# Altium PCB motordriver-v5.0.PcbDoc (part 1 of 2)
Units mil, origin at the board's own origin, x right, y up, seen from the top; angles counter-clockwise.
Board outline 6000 x 4000 mil, 4 copper layers (Top Copper, Signal Layer 1, Signal Layer 2, Bottom Copper), stack 46.063 mil thick; 260 components, 214 nets, 1002 pads, 160 vias.
Unrouted connection lines stored in the file: 596.
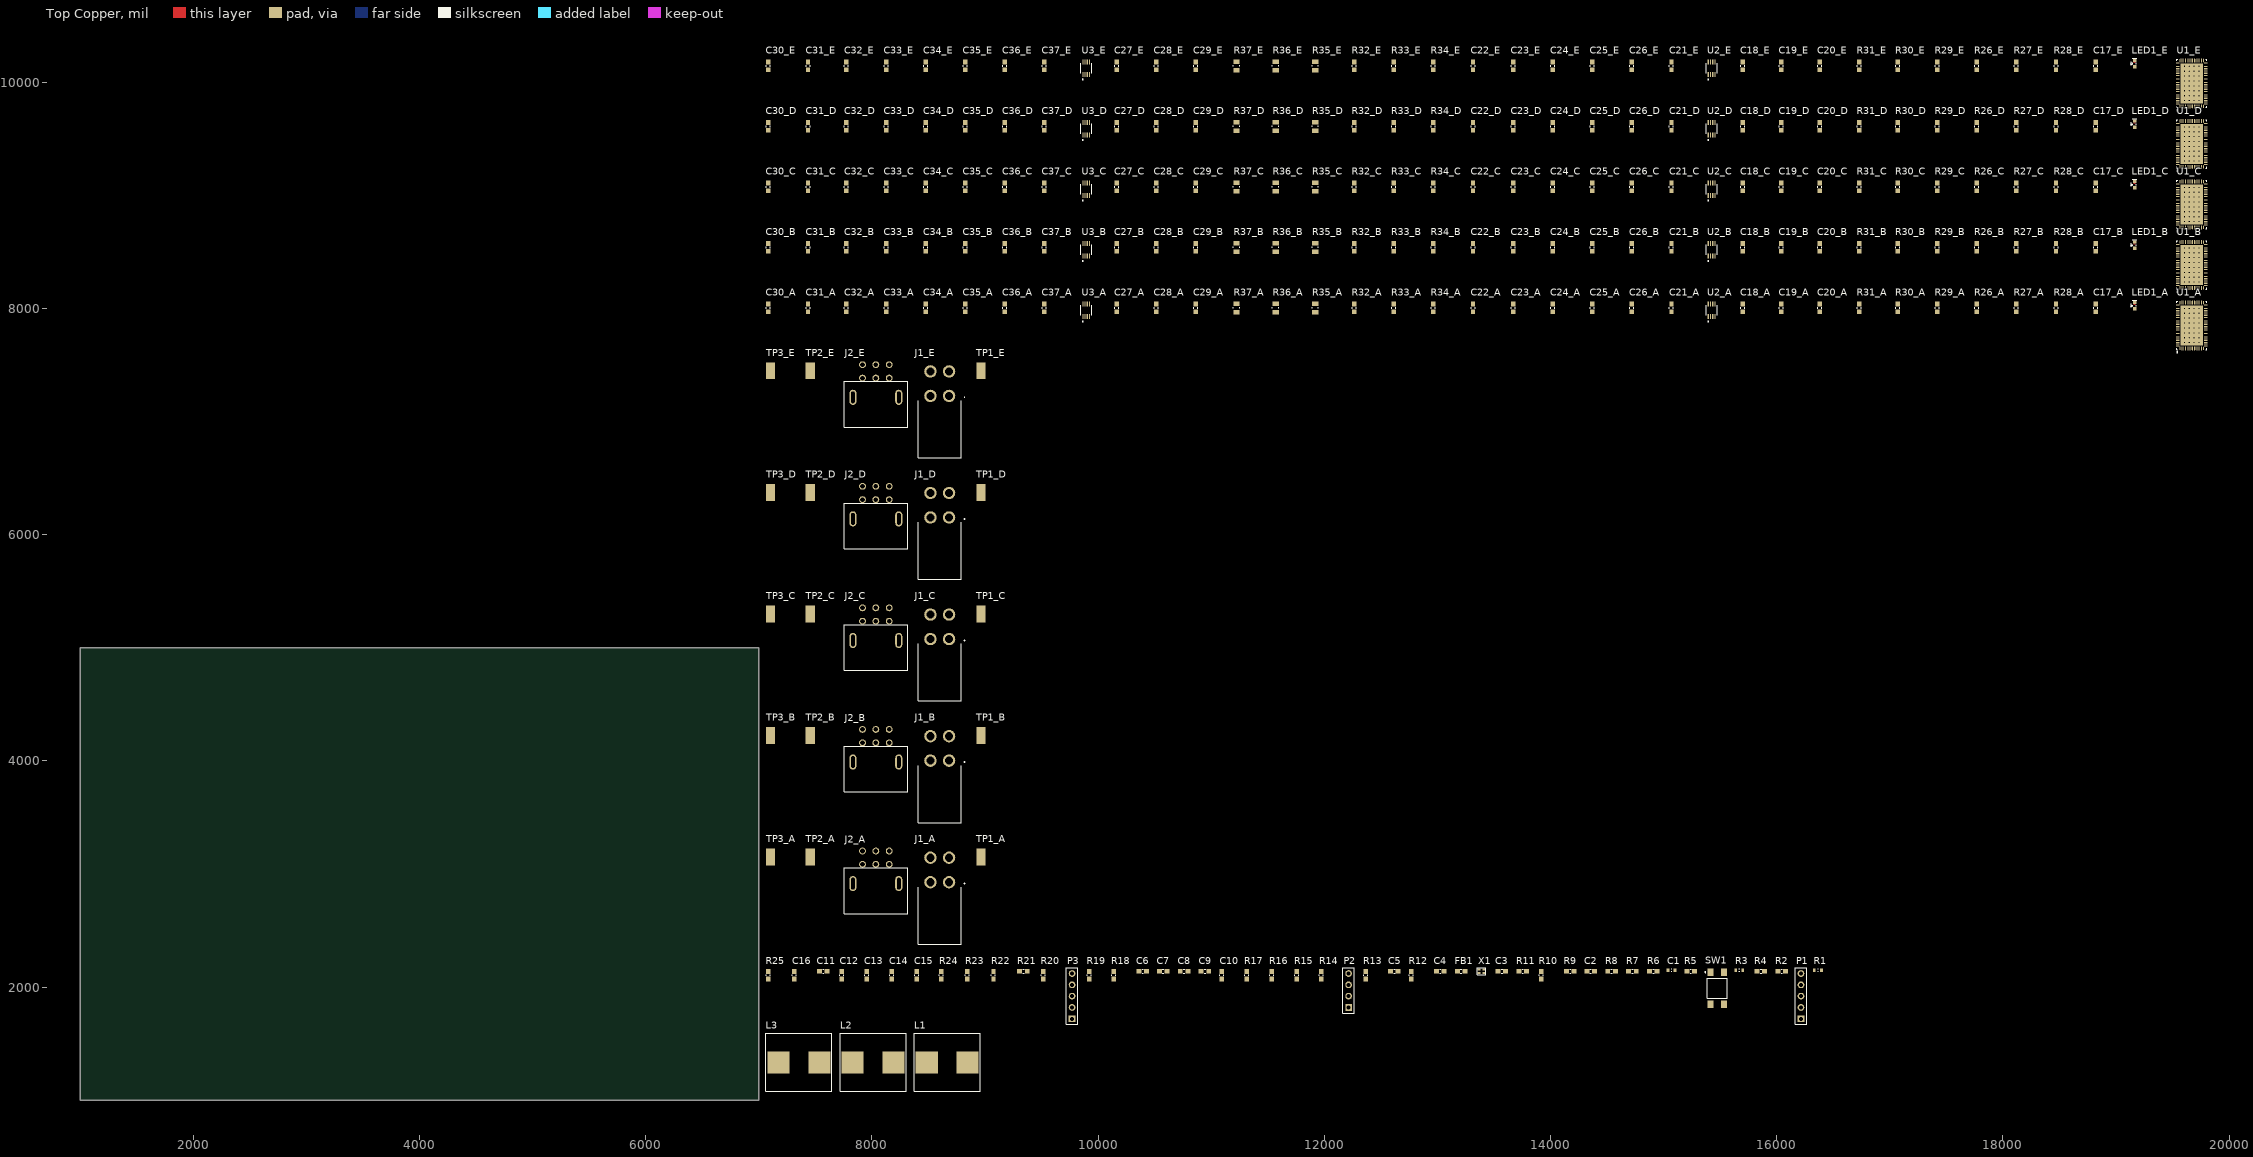
[diagram p0: Top Copper view]
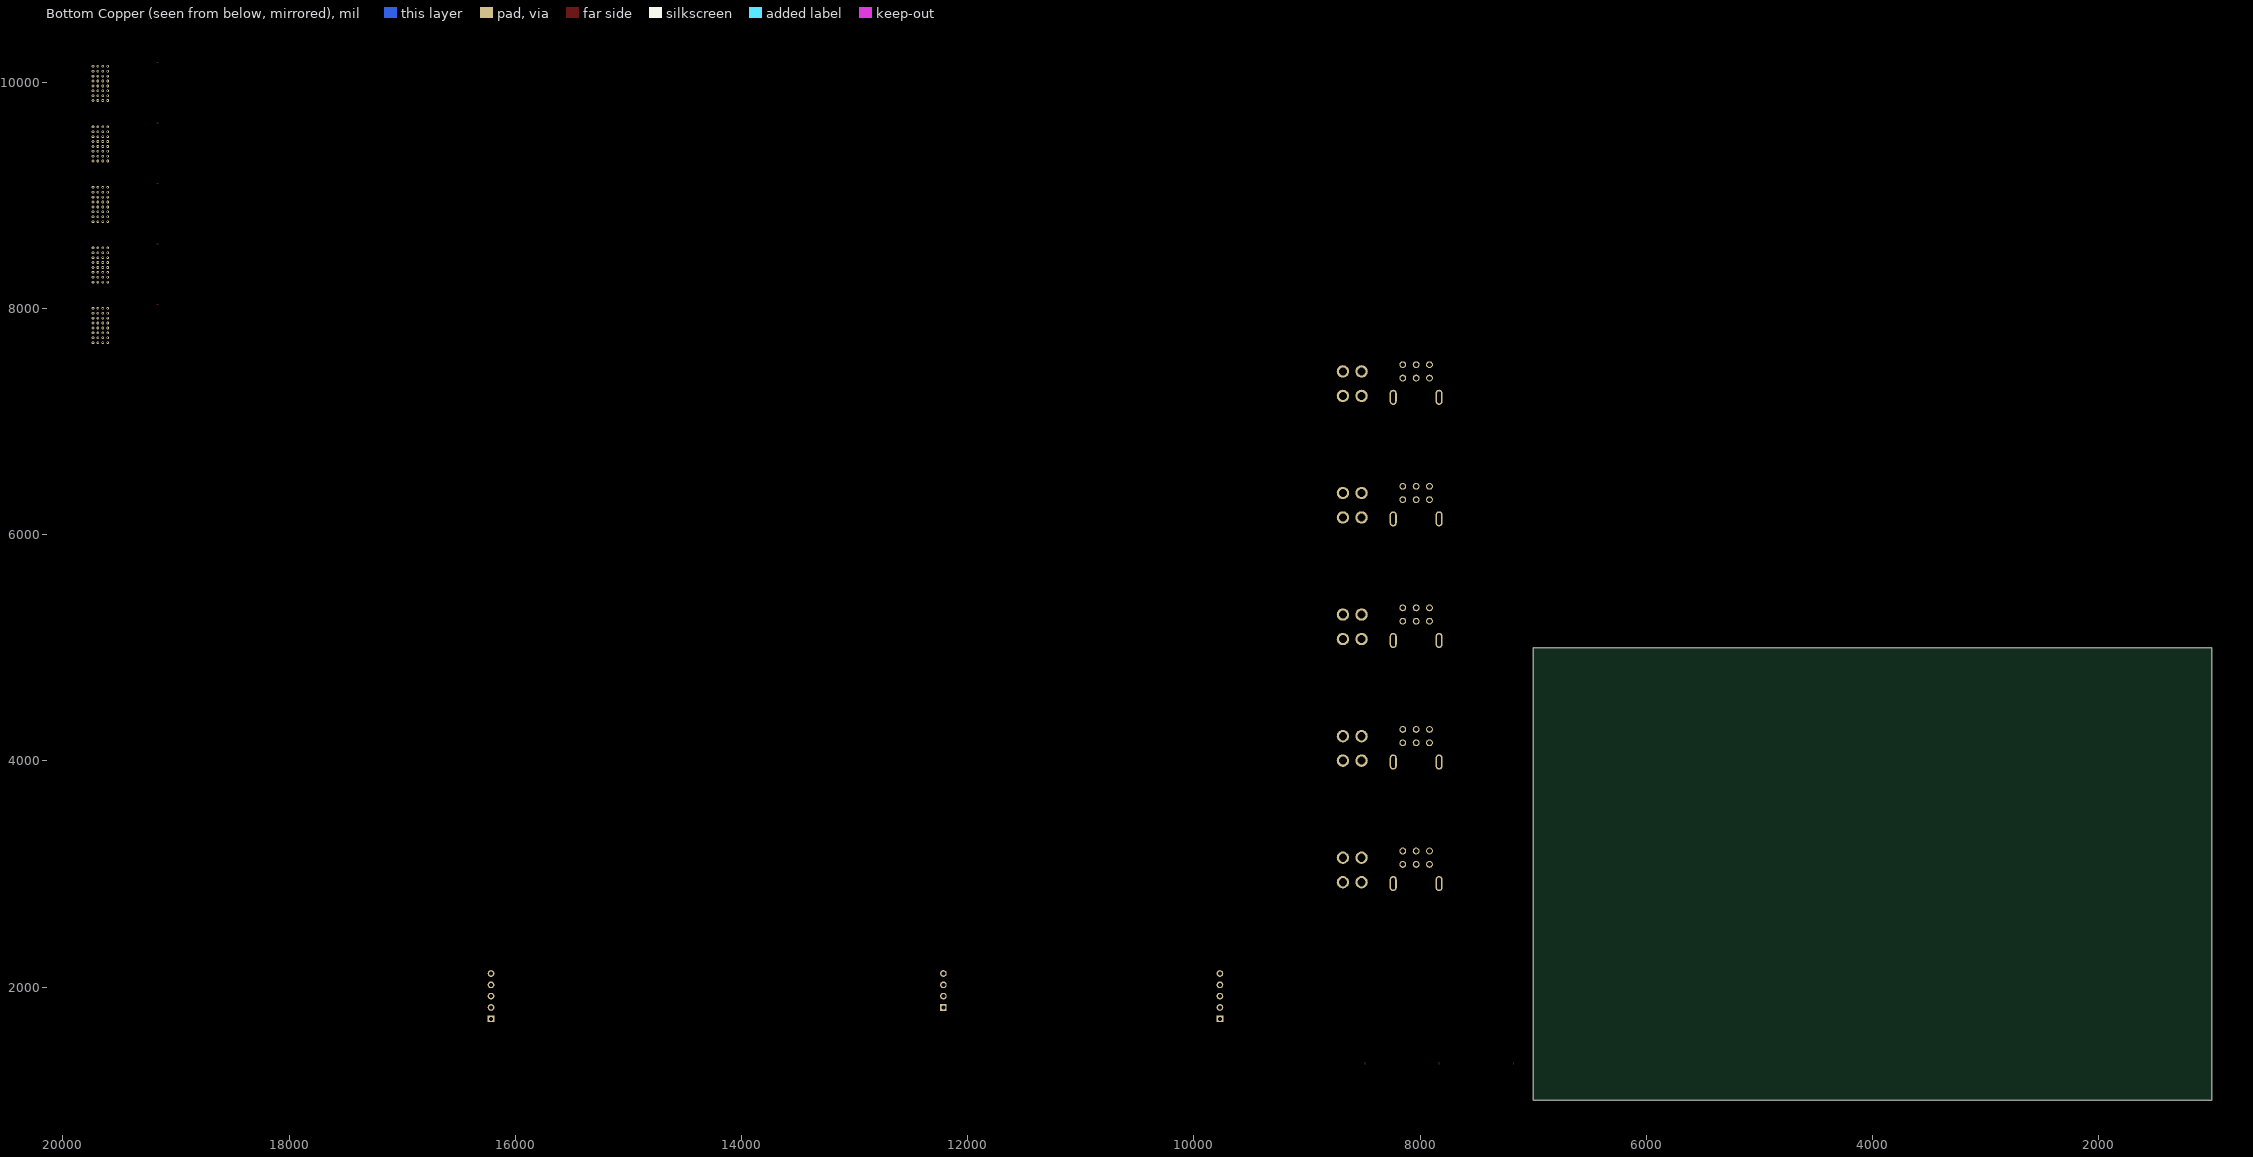
[diagram p1: Bottom Copper view, seen from below]

## Layer stack, top to bottom
Top Mask: solder mask 0.5906, Solder Resist, Dk 3.8
Top Copper: signal copper 1.378
Dielectric 1: prepreg 3.937, 2313, Dk 4.05
Signal Layer 1: signal copper 0.689
Core: core 34.0551, FR-4, Dk 4.5
Signal Layer 2: signal copper 0.689
Dielectric 2: prepreg 3.937, 2313, Dk 4.05
Bottom Copper: signal copper 1.378
Bottom Mask: solder mask 0.5906, Solder Resist, Dk 3.8

## Board outline
1000,1000 7000,1000 7000,5000 1000,5000

## Design rules (kind name [scope] priority, off if disabled: settings)
Clearance [All] p1: gap=10 ignorepadtopadclearanceinfootprint=FALSE except(0: Arc-Hole Track-Hole SMDPad-Hole THPad-Hole Via-Hole Fill-Hole Poly-Hole Region-Hole Text-Hole)
PolygonConnect [All] p1: connectstyle=Relief reliefconductorwidth=10 reliefentries=4 polygonreliefangle="90 Angle" airgapwidth=10
RoomDefinition "Trinamic Controller5" [InComponentClass('Trinamic Controller5')] p1: confinementstyle=ConfineIn formatcopy=TRUE lockcomponents=FALSE outline 7045,9735 19820,9735 19820,10330 7045,10330
RoomDefinition "Trinamic Controller4" [InComponentClass('Trinamic Controller4')] p2: confinementstyle=ConfineIn formatcopy=TRUE lockcomponents=FALSE outline 7045,9200 19820,9200 19820,9795 7045,9795
RoomDefinition "Trinamic Controller3" [InComponentClass('Trinamic Controller3')] p3: confinementstyle=ConfineIn formatcopy=TRUE lockcomponents=FALSE outline 7045,8665 19820,8665 19820,9260 7045,9260
RoomDefinition "Trinamic Controller2" [InComponentClass('Trinamic Controller2')] p4: confinementstyle=ConfineIn formatcopy=TRUE lockcomponents=FALSE outline 7045,8130 19820,8130 19820,8725 7045,8725
RoomDefinition "Trinamic Controller1" [InComponentClass('Trinamic Controller1')] p5: confinementstyle=ConfineIn formatcopy=TRUE lockcomponents=FALSE outline 7045,7595 19820,7595 19820,8190 7045,8190
RoomDefinition "Peripherals (No Duplicates)" [InComponentClass('Peripherals (No Duplicates)')] p6: confinementstyle=ConfineIn formatcopy=TRUE lockcomponents=FALSE outline 7045,1660 16425,1660 16425,2280 7045,2280
RoomDefinition INDUCTORS [InComponentClass('INDUCTORS')] p7: confinementstyle=ConfineIn formatcopy=TRUE lockcomponents=FALSE outline 7045,1060 8975,1060 8975,1710 7045,1710
RoomDefinition Connectors5 [InComponentClass('Connectors5')] p8: confinementstyle=ConfineIn formatcopy=TRUE lockcomponents=FALSE outline 7045,6630 9210,6630 9210,7655 7045,7655
RoomDefinition Connectors4 [InComponentClass('Connectors4')] p9: confinementstyle=ConfineIn formatcopy=TRUE lockcomponents=FALSE outline 7045,5555 9210,5555 9210,6580 7045,6580
RoomDefinition Connectors3 [InComponentClass('Connectors3')] p10: confinementstyle=ConfineIn formatcopy=TRUE lockcomponents=FALSE outline 7045,4480 9210,4480 9210,5505 7045,5505
RoomDefinition Connectors2 [InComponentClass('Connectors2')] p11: confinementstyle=ConfineIn formatcopy=TRUE lockcomponents=FALSE outline 7045,3405 9210,3405 9210,4430 7045,4430
RoomDefinition Connectors1 [InComponentClass('Connectors1')] p12: confinementstyle=ConfineIn formatcopy=TRUE lockcomponents=FALSE outline 7045,2330 9210,2330 9210,3355 7045,3355
RoutingVias [All] p1: holewidth=28 width=50 viastyle="Through Hole" minholewidth=28 minwidth=50 maxholewidth=28 maxwidth=50
SolderMaskExpansion [All] p1: expansion=4 istentingtop=FALSE
Width [All] p1: maxlimit=10 minlimit=10 preferedwidth=10
30 further rules are at their usual default settings.

## Classes and differential pairs
channel class motordriver-v5.0_trinamic-controller: "Trinamic Controller1" "Trinamic Controller2" "Trinamic Controller3" "Trinamic Controller4" "Trinamic Controller5"
channel class motordriver-v5.0_driver-power-stage: "Driver Power Stage1" "Driver Power Stage2" "Driver Power Stage3" "Driver Power Stage4" "Driver Power Stage5"
channel class motordriver-v5.0_current-sense: "Current Sensing1" "Current Sensing2" "Current Sensing3" "Current Sensing4" "Current Sensing5"
channel class motordriver-v5.0_connectors: Connectors1 Connectors2 Connectors3 Connectors4 Connectors5
net class STATUS_CTRL[1..5]: STATUS_CTRL1 STATUS_CTRL2 STATUS_CTRL3 STATUS_CTRL4 STATUS_CTRL5
component class "Trinamic Controller5": C17_E C18_E C19_E C20_E C21_E C22_E C23_E C24_E C25_E C26_E C27_E C28_E C29_E C30_E C31_E C32_E C33_E C34_E C35_E C36_E C37_E LED1_E R26_E R27_E R28_E R29_E R30_E R31_E R32_E R33_E R34_E R35_E R36_E R37_E U1_E U2_E U3_E
component class "Trinamic Controller4": C17_D C18_D C19_D C20_D C21_D C22_D C23_D C24_D C25_D C26_D C27_D C28_D C29_D C30_D C31_D C32_D C33_D C34_D C35_D C36_D C37_D LED1_D R26_D R27_D R28_D R29_D R30_D R31_D R32_D R33_D R34_D R35_D R36_D R37_D U1_D U2_D U3_D
component class "Trinamic Controller3": C17_C C18_C C19_C C20_C C21_C C22_C C23_C C24_C C25_C C26_C C27_C C28_C C29_C C30_C C31_C C32_C C33_C C34_C C35_C C36_C C37_C LED1_C R26_C R27_C R28_C R29_C R30_C R31_C R32_C R33_C R34_C R35_C R36_C R37_C U1_C U2_C U3_C
component class "Trinamic Controller2": C17_B C18_B C19_B C20_B C21_B C22_B C23_B C24_B C25_B C26_B C27_B C28_B C29_B C30_B C31_B C32_B C33_B C34_B C35_B C36_B C37_B LED1_B R26_B R27_B R28_B R29_B R30_B R31_B R32_B R33_B R34_B R35_B R36_B R37_B U1_B U2_B U3_B
component class "Trinamic Controller1": C17_A C18_A C19_A C20_A C21_A C22_A C23_A C24_A C25_A C26_A C27_A C28_A C29_A C30_A C31_A C32_A C33_A C34_A C35_A C36_A C37_A LED1_A R26_A R27_A R28_A R29_A R30_A R31_A R32_A R33_A R34_A R35_A R36_A R37_A U1_A U2_A U3_A
component class "Peripherals (No Duplicates)": C1 C2 C3 C4 C5 C6 C7 C8 C9 C10 C11 C12 C13 C14 C15 C16 FB1 P1 P2 P3 R1 R2 R3 R4 R5 R6 R7 R8 R9 R10 R11 R12 R13 R14 R15 R16 R17 R18 R19 R20 R21 R22 R23 R24 R25 SW1 X1
component class INDUCTORS: L1 L2 L3
component class Connectors5: J1_E J2_E TP1_E TP2_E TP3_E
component class Connectors4: J1_D J2_D TP1_D TP2_D TP3_D
component class Connectors3: J1_C J2_C TP1_C TP2_C TP3_C
component class Connectors2: J1_B J2_B TP1_B TP2_B TP3_B
component class Connectors1: J1_A J2_A TP1_A TP2_A TP3_A

## Components (designator, comment, footprint, x,y, rotation, side; value= is the part's Value field where it differs from the comment)
C1 "3300pF" 0603#1 15070,2150 r0 top
C2 "100nF 50V" 0603#2 14355,2140 r0 top value=100nF
C3 "100pF" 0603#2 13570,2140 r0 top
C4 "100pF" 0603#2 13025,2140 r0 top
C5 "100nF 50V" 0603#2 12620,2140 r0 top value=100nF
C6 "100nF 50V" 0603#2 10395,2140 r0 top value=100nF
C7 "100pF" 0603#2 10575,2140 r0 top
C8 "100pF" 0603#2 10760,2140 r0 top
C9 "100pF" 0603#2 10945,2140 r0 top
C10 "100pF" 0603#2 11095,2105 r90 top
C11 "100pF" 0603#2 7570,2140 r0 top
C12 "100pF" 0603#2 7735,2105 r90 top
C13 "100pF" 0603#2 7955,2105 r90 top
C14 "100pF" 0603#2 8175,2105 r90 top
C15 "100pF" 0603#2 8395,2105 r90 top
C16 "100nF 50V" 0603#2 7315,2105 r90 top value=100nF
C17_A "100nF 50V" 0603#2 18820,8005 r90 top value=100nF (schematic designator C17)
C17_B "100nF 50V" 0603#2 18820,8540 r90 top value=100nF (schematic designator C17)
C17_C "100nF 50V" 0603#2 18820,9075 r90 top value=100nF (schematic designator C17)
C17_D "100nF 50V" 0603#2 18820,9610 r90 top value=100nF (schematic designator C17)
C17_E "100nF 50V" 0603#2 18820,10145 r90 top value=100nF (schematic designator C17)
C18_A "1000pF" 0603#2 15700,8005 r90 top (schematic designator C18)
C18_B "1000pF" 0603#2 15700,8540 r90 top (schematic designator C18)
C18_C "1000pF" 0603#2 15700,9075 r90 top (schematic designator C18)
C18_D "1000pF" 0603#2 15700,9610 r90 top (schematic designator C18)
C18_E "1000pF" 0603#2 15700,10145 r90 top (schematic designator C18)
C19_A "1000pF" 0603#2 16040,8005 r90 top (schematic designator C19)
C19_B "1000pF" 0603#2 16040,8540 r90 top (schematic designator C19)
C19_C "1000pF" 0603#2 16040,9075 r90 top (schematic designator C19)
C19_D "1000pF" 0603#2 16040,9610 r90 top (schematic designator C19)
C19_E "1000pF" 0603#2 16040,10145 r90 top (schematic designator C19)
C20_A "1000pF" 0603#2 16380,8005 r90 top (schematic designator C20)
C20_B "1000pF" 0603#2 16380,8540 r90 top (schematic designator C20)
C20_C "1000pF" 0603#2 16380,9075 r90 top (schematic designator C20)
C20_D "1000pF" 0603#2 16380,9610 r90 top (schematic designator C20)
C20_E "1000pF" 0603#2 16380,10145 r90 top (schematic designator C20)
C21_A "100nF 50V" 0603#2 15070,8005 r90 top value=100nF (schematic designator C21)
C21_B "100nF 50V" 0603#2 15070,8540 r90 top value=100nF (schematic designator C21)
C21_C "100nF 50V" 0603#2 15070,9075 r90 top value=100nF (schematic designator C21)
C21_D "100nF 50V" 0603#2 15070,9610 r90 top value=100nF (schematic designator C21)
C21_E "100nF 50V" 0603#2 15070,10145 r90 top value=100nF (schematic designator C21)
C22_A "4.7uF" 0603#2 13315,8005 r90 top (schematic designator C22)
C22_B "4.7uF" 0603#2 13315,8540 r90 top (schematic designator C22)
C22_C "4.7uF" 0603#2 13315,9075 r90 top (schematic designator C22)
C22_D "4.7uF" 0603#2 13315,9610 r90 top (schematic designator C22)
C22_E "4.7uF" 0603#2 13315,10145 r90 top (schematic designator C22)
C23_A "100nF 50V" 0603#2 13670,8005 r90 top value=100nF (schematic designator C23)
C23_B "100nF 50V" 0603#2 13670,8540 r90 top value=100nF (schematic designator C23)
C23_C "100nF 50V" 0603#2 13670,9075 r90 top value=100nF (schematic designator C23)
C23_D "100nF 50V" 0603#2 13670,9610 r90 top value=100nF (schematic designator C23)
C23_E "100nF 50V" 0603#2 13670,10145 r90 top value=100nF (schematic designator C23)
C24_A "100nF 50V" 0603#2 14020,8005 r90 top value=100nF (schematic designator C24)
C24_B "100nF 50V" 0603#2 14020,8540 r90 top value=100nF (schematic designator C24)
C24_C "100nF 50V" 0603#2 14020,9075 r90 top value=100nF (schematic designator C24)
C24_D "100nF 50V" 0603#2 14020,9610 r90 top value=100nF (schematic designator C24)
C24_E "100nF 50V" 0603#2 14020,10145 r90 top value=100nF (schematic designator C24)
C25_A "100nF 50V" 0603#2 14370,8005 r90 top value=100nF (schematic designator C25)
C25_B "100nF 50V" 0603#2 14370,8540 r90 top value=100nF (schematic designator C25)
C25_C "100nF 50V" 0603#2 14370,9075 r90 top value=100nF (schematic designator C25)
C25_D "100nF 50V" 0603#2 14370,9610 r90 top value=100nF (schematic designator C25)
C25_E "100nF 50V" 0603#2 14370,10145 r90 top value=100nF (schematic designator C25)
C26_A "100nF 50V" 0603#2 14720,8005 r90 top value=100nF (schematic designator C26)
C26_B "100nF 50V" 0603#2 14720,8540 r90 top value=100nF (schematic designator C26)
C26_C "100nF 50V" 0603#2 14720,9075 r90 top value=100nF (schematic designator C26)
C26_D "100nF 50V" 0603#2 14720,9610 r90 top value=100nF (schematic designator C26)
C26_E "100nF 50V" 0603#2 14720,10145 r90 top value=100nF (schematic designator C26)
C27_A "100nF 50V" 0603#2 10165,8005 r90 top value=100nF (schematic designator C27)
C27_B "100nF 50V" 0603#2 10165,8540 r90 top value=100nF (schematic designator C27)
C27_C "100nF 50V" 0603#2 10165,9075 r90 top value=100nF (schematic designator C27)
C27_D "100nF 50V" 0603#2 10165,9610 r90 top value=100nF (schematic designator C27)
C27_E "100nF 50V" 0603#2 10165,10145 r90 top value=100nF (schematic designator C27)
C28_A "100nF 50V" 0603#2 10515,8005 r90 top value=100nF (schematic designator C28)
C28_B "100nF 50V" 0603#2 10515,8540 r90 top value=100nF (schematic designator C28)
C28_C "100nF 50V" 0603#2 10515,9075 r90 top value=100nF (schematic designator C28)
C28_D "100nF 50V" 0603#2 10515,9610 r90 top value=100nF (schematic designator C28)
C28_E "100nF 50V" 0603#2 10515,10145 r90 top value=100nF (schematic designator C28)
C29_A "100nF 50V" 0603#2 10865,8005 r90 top value=100nF (schematic designator C29)
C29_B "100nF 50V" 0603#2 10865,8540 r90 top value=100nF (schematic designator C29)
C29_C "100nF 50V" 0603#2 10865,9075 r90 top value=100nF (schematic designator C29)
C29_D "100nF 50V" 0603#2 10865,9610 r90 top value=100nF (schematic designator C29)
C29_E "100nF 50V" 0603#2 10865,10145 r90 top value=100nF (schematic designator C29)
C30_A "4.7uF" 0603#2 7085,8005 r90 top (schematic designator C30)
C30_B "4.7uF" 0603#2 7085,8540 r90 top (schematic designator C30)
C30_C "4.7uF" 0603#2 7085,9075 r90 top (schematic designator C30)
C30_D "4.7uF" 0603#2 7085,9610 r90 top (schematic designator C30)
C30_E "4.7uF" 0603#2 7085,10145 r90 top (schematic designator C30)
C31_A "470nF 50V" 0603#2 7435,8005 r90 top value=470nF (schematic designator C31)
C31_B "470nF 50V" 0603#2 7435,8540 r90 top value=470nF (schematic designator C31)
C31_C "470nF 50V" 0603#2 7435,9075 r90 top value=470nF (schematic designator C31)
C31_D "470nF 50V" 0603#2 7435,9610 r90 top value=470nF (schematic designator C31)
C31_E "470nF 50V" 0603#2 7435,10145 r90 top value=470nF (schematic designator C31)
C32_A "100nF 50V" 0603#2 7775,8005 r90 top value=100nF (schematic designator C32)
C32_B "100nF 50V" 0603#2 7775,8540 r90 top value=100nF (schematic designator C32)
C32_C "100nF 50V" 0603#2 7775,9075 r90 top value=100nF (schematic designator C32)
C32_D "100nF 50V" 0603#2 7775,9610 r90 top value=100nF (schematic designator C32)
C32_E "100nF 50V" 0603#2 7775,10145 r90 top value=100nF (schematic designator C32)
C33_A "100nF 50V" 0603#2 8125,8005 r90 top value=100nF (schematic designator C33)
C33_B "100nF 50V" 0603#2 8125,8540 r90 top value=100nF (schematic designator C33)
C33_C "100nF 50V" 0603#2 8125,9075 r90 top value=100nF (schematic designator C33)
C33_D "100nF 50V" 0603#2 8125,9610 r90 top value=100nF (schematic designator C33)
C33_E "100nF 50V" 0603#2 8125,10145 r90 top value=100nF (schematic designator C33)
C34_A "100nF 50V" 0603#2 8475,8005 r90 top value=100nF (schematic designator C34)
C34_B "100nF 50V" 0603#2 8475,8540 r90 top value=100nF (schematic designator C34)
C34_C "100nF 50V" 0603#2 8475,9075 r90 top value=100nF (schematic designator C34)
C34_D "100nF 50V" 0603#2 8475,9610 r90 top value=100nF (schematic designator C34)
C34_E "100nF 50V" 0603#2 8475,10145 r90 top value=100nF (schematic designator C34)
C35_A "100nF 50V" 0603#2 8825,8005 r90 top value=100nF (schematic designator C35)
C35_B "100nF 50V" 0603#2 8825,8540 r90 top value=100nF (schematic designator C35)
C35_C "100nF 50V" 0603#2 8825,9075 r90 top value=100nF (schematic designator C35)
C35_D "100nF 50V" 0603#2 8825,9610 r90 top value=100nF (schematic designator C35)
C35_E "100nF 50V" 0603#2 8825,10145 r90 top value=100nF (schematic designator C35)
C36_A "100nF 50V" 0603#2 9175,8005 r90 top value=100nF (schematic designator C36)
C36_B "100nF 50V" 0603#2 9175,8540 r90 top value=100nF (schematic designator C36)
C36_C "100nF 50V" 0603#2 9175,9075 r90 top value=100nF (schematic designator C36)
C36_D "100nF 50V" 0603#2 9175,9610 r90 top value=100nF (schematic designator C36)
C36_E "100nF 50V" 0603#2 9175,10145 r90 top value=100nF (schematic designator C36)
C37_A "100nF 50V" 0603#2 9525,8005 r90 top value=100nF (schematic designator C37)
C37_B "100nF 50V" 0603#2 9525,8540 r90 top value=100nF (schematic designator C37)
C37_C "100nF 50V" 0603#2 9525,9075 r90 top value=100nF (schematic designator C37)
C37_D "100nF 50V" 0603#2 9525,9610 r90 top value=100nF (schematic designator C37)
C37_E "100nF 50V" 0603#2 9525,10145 r90 top value=100nF (schematic designator C37)
FB1 "600R/1A" 0603#2 13210,2140 r0 top
J1_A "CN HDR 4POS Molex 26013115 (R)" 26013115 8600,2640 r0 top (schematic designator J1)
J1_B "CN HDR 4POS Molex 26013115 (R)" 26013115 8600,3715 r0 top (schematic designator J1)
J1_C "CN HDR 4POS Molex 26013115 (R)" 26013115 8600,4790 r0 top (schematic designator J1)
J1_D "CN HDR 4POS Molex 26013115 (R)" 26013115 8600,5865 r0 top (schematic designator J1)
J1_E "CN HDR 4POS Molex 26013115 (R)" 26013115 8600,6940 r0 top (schematic designator J1)
J2_A "CN HDR 6POS Molex 43045-0622 (R)" 430450622 8035,2915 r0 top (schematic designator J2)
J2_B "CN HDR 6POS Molex 43045-0622 (R)" 430450622 8035,3990 r0 top (schematic designator J2)
J2_C "CN HDR 6POS Molex 43045-0622 (R)" 430450622 8035,5065 r0 top (schematic designator J2)
J2_D "CN HDR 6POS Molex 43045-0622 (R)" 430450622 8035,6140 r0 top (schematic designator J2)
J2_E "CN HDR 6POS Molex 43045-0622 (R)" 430450622 8035,7215 r0 top (schematic designator J2)
L1 "56 UH" "EATON _HCM1A1307V2-560-R" 8665,1335 r0 top value="56 µH"
L2 "56 UH" "EATON _HCM1A1307V2-560-R" 8010,1335 r0 top value="56 µH"
L3 "56 UH" "EATON _HCM1A1307V2-560-R" 7355,1335 r0 top value="56 µH"
LED1_A "0603 3.3V" "0603 - LED" 19165,8025 r90 top (schematic designator LED1)
LED1_B "0603 3.3V" "0603 - LED" 19165,8560 r90 top (schematic designator LED1)
LED1_C "0603 3.3V" "0603 - LED" 19165,9095 r90 top (schematic designator LED1)
LED1_D "0603 3.3V" "0603 - LED" 19165,9630 r90 top (schematic designator LED1)
LED1_E "0603 3.3V" "0603 - LED" 19165,10165 r90 top (schematic designator LED1)
P1 "Header 5" HDR1X5 16215,1720 r90 top
P2 "Header 4" HDR1X4 12215,1820 r90 top
P3 "Header 5" HDR1X5 9770,1720 r90 top
R1 "39k" 0603#1 16365,2150 r0 top
R2 "150" 0603#2 16045,2140 r0 top
R3 "100" 0603#1 15670,2150 r0 top
R4 "150" 0603#2 15860,2140 r0 top
R5 "4.7k" 0603#2 15240,2140 r0 top
R6 "150" 0603#2 14910,2140 r0 top
R7 "150" 0603#2 14725,2140 r0 top
R8 "150" 0603#2 14540,2140 r0 top
R9 "270" 0603#2 14175,2140 r0 top
R10 "4.7k" 0603#2 13920,2105 r90 top
R11 "270" 0603#2 13755,2140 r0 top
R12 "10k NTC THERMISTOR" 0603#2 12770,2105 r90 top
R13 "270" 0603#2 12365,2105 r90 top
R14 "270" 0603#2 11975,2105 r90 top
R15 "270" 0603#2 11755,2105 r90 top
R16 "4.7k" 0603#2 11535,2105 r90 top
R17 "270" 0603#2 11315,2105 r90 top
R18 "4.7k" 0603#2 10140,2105 r90 top
R19 "270" 0603#2 9920,2105 r90 top
R20 "270" 0603#2 9515,2105 r90 top
R21 "270" 0603#2 9340,2140 r0 top
R22 "270" 0603#2 9075,2105 r90 top
R23 "270" 0603#2 8845,2105 r90 top
R24 "47k" 0603#2 8615,2105 r90 top
R25 "1k" 0603#2 7085,2105 r90 top
R26_A "4.7k" 0603#2 17770,8005 r90 top (schematic designator R26)
R26_B "4.7k" 0603#2 17770,8540 r90 top (schematic designator R26)
R26_C "4.7k" 0603#2 17770,9075 r90 top (schematic designator R26)
R26_D "4.7k" 0603#2 17770,9610 r90 top (schematic designator R26)
R26_E "4.7k" 0603#2 17770,10145 r90 top (schematic designator R26)
R27_A "4.7k" 0603#2 18120,8005 r90 top (schematic designator R27)
R27_B "4.7k" 0603#2 18120,8540 r90 top (schematic designator R27)
R27_C "4.7k" 0603#2 18120,9075 r90 top (schematic designator R27)
R27_D "4.7k" 0603#2 18120,9610 r90 top (schematic designator R27)
R27_E "4.7k" 0603#2 18120,10145 r90 top (schematic designator R27)
R28_A "4.7k" 0603#2 18470,8005 r90 top (schematic designator R28)
R28_B "4.7k" 0603#2 18470,8540 r90 top (schematic designator R28)
R28_C "4.7k" 0603#2 18470,9075 r90 top (schematic designator R28)
R28_D "4.7k" 0603#2 18470,9610 r90 top (schematic designator R28)
R28_E "4.7k" 0603#2 18470,10145 r90 top (schematic designator R28)
R29_A "4.7k" 0603#2 17420,8005 r90 top (schematic designator R29)
R29_B "4.7k" 0603#2 17420,8540 r90 top (schematic designator R29)
R29_C "4.7k" 0603#2 17420,9075 r90 top (schematic designator R29)
R29_D "4.7k" 0603#2 17420,9610 r90 top (schematic designator R29)
R29_E "4.7k" 0603#2 17420,10145 r90 top (schematic designator R29)
R30_A "4.7k" 0603#2 17070,8005 r90 top (schematic designator R30)
R30_B "4.7k" 0603#2 17070,8540 r90 top (schematic designator R30)
R30_C "4.7k" 0603#2 17070,9075 r90 top (schematic designator R30)
R30_D "4.7k" 0603#2 17070,9610 r90 top (schematic designator R30)
R30_E "4.7k" 0603#2 17070,10145 r90 top (schematic designator R30)
R31_A "4.7k" 0603#2 16730,8005 r90 top (schematic designator R31)
R31_B "4.7k" 0603#2 16730,8540 r90 top (schematic designator R31)
R31_C "4.7k" 0603#2 16730,9075 r90 top (schematic designator R31)
R31_D "4.7k" 0603#2 16730,9610 r90 top (schematic designator R31)
R31_E "4.7k" 0603#2 16730,10145 r90 top (schematic designator R31)
R32_A "4.7k" 0603#2 12265,8005 r90 top (schematic designator R32)
R32_B "4.7k" 0603#2 12265,8540 r90 top (schematic designator R32)
R32_C "4.7k" 0603#2 12265,9075 r90 top (schematic designator R32)
R32_D "4.7k" 0603#2 12265,9610 r90 top (schematic designator R32)
R32_E "4.7k" 0603#2 12265,10145 r90 top (schematic designator R32)
R33_A "4.7k" 0603#2 12615,8005 r90 top (schematic designator R33)
R33_B "4.7k" 0603#2 12615,8540 r90 top (schematic designator R33)
R33_C "4.7k" 0603#2 12615,9075 r90 top (schematic designator R33)
R33_D "4.7k" 0603#2 12615,9610 r90 top (schematic designator R33)
R33_E "4.7k" 0603#2 12615,10145 r90 top (schematic designator R33)
R34_A "4.7k" 0603#2 12965,8005 r90 top (schematic designator R34)
R34_B "4.7k" 0603#2 12965,8540 r90 top (schematic designator R34)
R34_C "4.7k" 0603#2 12965,9075 r90 top (schematic designator R34)
R34_D "4.7k" 0603#2 12965,9610 r90 top (schematic designator R34)
R34_E "4.7k" 0603#2 12965,10145 r90 top (schematic designator R34)
R35_A "1k" 0805 11920,8005 r90 top (schematic designator R35)
R35_B "1k" 0805 11920,8540 r90 top (schematic designator R35)
R35_C "1k" 0805 11920,9075 r90 top (schematic designator R35)
R35_D "1k" 0805 11920,9610 r90 top (schematic designator R35)
R35_E "1k" 0805 11920,10145 r90 top (schematic designator R35)
R36_A "1k" 0805 11570,8005 r90 top (schematic designator R36)
R36_B "1k" 0805 11570,8540 r90 top (schematic designator R36)
R36_C "1k" 0805 11570,9075 r90 top (schematic designator R36)
R36_D "1k" 0805 11570,9610 r90 top (schematic designator R36)
R36_E "1k" 0805 11570,10145 r90 top (schematic designator R36)
R37_A "1k" 0805 11225,8005 r90 top (schematic designator R37)
R37_B "1k" 0805 11225,8540 r90 top (schematic designator R37)
R37_C "1k" 0805 11225,9075 r90 top (schematic designator R37)
R37_D "1k" 0805 11225,9610 r90 top (schematic designator R37)
R37_E "1k" 0805 11225,10145 r90 top (schematic designator R37)
SW1 "SW PUSH NO SMD" TL3305 15475,1990 r0 top
TP1_A "Test Point - 5019" TP380X203 8965,3150 r90 top (schematic designator TP1)
TP1_B "Test Point - 5019" TP380X203 8965,4225 r90 top (schematic designator TP1)
TP1_C "Test Point - 5019" TP380X203 8965,5300 r90 top (schematic designator TP1)
TP1_D "Test Point - 5019" TP380X203 8965,6375 r90 top (schematic designator TP1)
TP1_E "Test Point - 5019" TP380X203 8965,7450 r90 top (schematic designator TP1)
TP2_A "Test Point - 5019" TP380X203 7455,3150 r90 top (schematic designator TP2)
TP2_B "Test Point - 5019" TP380X203 7455,4225 r90 top (schematic designator TP2)
TP2_C "Test Point - 5019" TP380X203 7455,5300 r90 top (schematic designator TP2)
TP2_D "Test Point - 5019" TP380X203 7455,6375 r90 top (schematic designator TP2)
TP2_E "Test Point - 5019" TP380X203 7455,7450 r90 top (schematic designator TP2)
TP3_A "Test Point - 5019" TP380X203 7105,3150 r90 top (schematic designator TP3)
TP3_B "Test Point - 5019" TP380X203 7105,4225 r90 top (schematic designator TP3)
TP3_C "Test Point - 5019" TP380X203 7105,5300 r90 top (schematic designator TP3)
TP3_D "Test Point - 5019" TP380X203 7105,6375 r90 top (schematic designator TP3)
TP3_E "Test Point - 5019" TP380X203 7105,7450 r90 top (schematic designator TP3)
U1_A "TMC4671" QFN40P1050X650X90_HS-77N 19670,7850 r90 top (schematic designator U1)
U1_B "TMC4671" QFN40P1050X650X90_HS-77N 19670,8385 r90 top (schematic designator U1)
U1_C "TMC4671" QFN40P1050X650X90_HS-77N 19670,8920 r90 top (schematic designator U1)
U1_D "TMC4671" QFN40P1050X650X90_HS-77N 19670,9455 r90 top (schematic designator U1)
U1_E "TMC4671" QFN40P1050X650X90_HS-77N 19670,9990 r90 top (schematic designator U1)
U2_A "74LVC3G17DC,125" 8-VSSOP 15425,7985 r90 top (schematic designator U2)
U2_B "74LVC3G17DC,125" 8-VSSOP 15425,8520 r90 top (schematic designator U2)
U2_C "74LVC3G17DC,125" 8-VSSOP 15425,9055 r90 top (schematic designator U2)
U2_D "74LVC3G17DC,125" 8-VSSOP 15425,9590 r90 top (schematic designator U2)
U2_E "74LVC3G17DC,125" 8-VSSOP 15425,10125 r90 top (schematic designator U2)
U3_A "74LVC3G17DC,125" 8-VSSOP 9895,7985 r90 top (schematic designator U3)
U3_B "74LVC3G17DC,125" 8-VSSOP 9895,8520 r90 top (schematic designator U3)
U3_C "74LVC3G17DC,125" 8-VSSOP 9895,9055 r90 top (schematic designator U3)
U3_D "74LVC3G17DC,125" 8-VSSOP 9895,9590 r90 top (schematic designator U3)
U3_E "74LVC3G17DC,125" 8-VSSOP 9895,10125 r90 top (schematic designator U3)
X1 "ECS-1612MV-250-CN-TR" ECS-1612MV-250-CN-TR 13390,2140 r0 top

## Footprints (in the part's own frame and the unit in brackets; to place one, negate y for a bottom-side part, rotate by r counter-clockwise, add the part's x,y. Pads: shape width x height; smd on the part's side, far side on the other; paste and mask are expansions set on the pad)
8-VSSOP [mm]
  rrect25% 1.12x0.27 smd: 1(-1.405,0.75) 2(-1.405,0.25) 3(-1.405,-0.25) 4(-1.405,-0.75) 5(1.405,-0.75) 6(1.405,-0.25) 7(1.405,0.25) 8(1.405,0.75)
  silkscreen extent -2.62,-1.2 1.15,1.2, body extent -1.55,-1 1.55,1, height 0.9
0603#1 [mm] "Chip Resistor, 2-Leads, Body 1.60x0.80mm, IPC High Density"
  rect 0.6x0.8 smd: 1(-0.8,0) 2(0.8,0)
  silkscreen extent -0.1,-0.3 0.1,0.3, body extent -0.8,-0.4 0.8,0.4, height 0.6
0603#2 [mm]
  rect 1.1x1 smd: 1(-0.85,0) 2(0.85,0)
  silkscreen extent -0.15,-0.45 0.15,0.45
"0603 - LED" [mm]
  rect 0.7x0.8 smd: 1(-0.7,0) 2(0.7,0)
  Top Copper region: 0.1,-0.2 0.355,-0.2 0.355,0.2 0.1,0.2
  silkscreen extent -0.4,-0.48 1.22,0.85, body extent -0.8,-0.4 0.8,0.4, height 0.65
0805 [mil]
  rect 40x55 smd: 1(-37,0) 2(37,0)
  silkscreen extent -4,-28 4,28
26013115 [mm]
  round 2.775 hole 1.85: 1(2.1,7.3) 2(-2.1,7.3) 3(2.1,12.8) 4(-2.1,12.8)
  round 1.525 hole 3.05 unplated: MH1(0,0)
  silkscreen extent -4.8,-6.6 5.6,7.05, body extent -4.8,-6.5 5.2,13.44, height 11.5
430450622 [mm]
  round 1.53 hole 1.02: 1(3,4.32) 2(0,4.32) 3(-3,4.32) 4(3,7.32) 5(0,7.32) 6(-3,7.32)
  round 0 hole 3: MH(0,0)
  oval 1.6x3.4 hole 0.8 slot 2.6 at 90 deg: MH1(5.15,0) MH2(-5.15,0)
  silkscreen extent -7.11,-6.71 7.11,3.56, body extent -6.62,-4.65 6.58,7.59, height 3.12
"EATON _HCM1A1307V2-560-R" [mm] "FIXED IND 56UH 4A 65 mOHM SMD"
  rect 5x4.95 smd: 1(-4.6,0) 2(4.6,0)
  Top Copper lines w0.254: -4.6,-0.4 -4.6,0
  silkscreen extent -7.42,-6.53 7.42,6.58, body extent -6.72,-6.3 6.73,6.3, height 6.4
ECS-1612MV-250-CN-TR [mm]
  rect 0.6x0.5 smd: 1(-0.55,-0.4) 2(0.55,-0.4) 3(0.55,0.4) 4(-0.55,0.4)
  silkscreen extent -1,-0.8 1,0.8, body extent -0.8,-0.6 0.8,0.6, height 0.7
HDR1X4 [mm] "Connector; Header; 4 Position"
  rect 1.5x1.5 hole 0.9: 1(0,0)
  round 1.5 hole 0.9: 2(2.54,0) 3(5.08,0) 4(7.62,0)
  silkscreen extent -1.27,-1.27 8.89,1.27
HDR1X5 [mm] "Connector; Header; 5 Position"
  rect 1.5x1.5 hole 0.9: 1(0,0)
  round 1.5 hole 0.9: 2(2.54,0) 3(5.08,0) 4(7.62,0) 5(10.16,0)
  silkscreen extent -1.27,-1.27 11.43,1.27
QFN40P1050X650X90_HS-77N [mm] "QFN, 76-Leads, Body 10,50x6,50mm, Pitch 0,40mm, Thermal Pad 9,00x5,00mm, IPC Medium Density"
  oval 0.8x0.182 smd mask+0.051: 1(-5.15,2.6) 14(-5.15,-2.6) 39(5.15,-2.6) 52(5.15,2.6)
  oval 0.85x0.182 smd mask+0.051: 2(-5.15,2.2) 3(-5.15,1.8) 4(-5.15,1.4) 5(-5.15,1) 6(-5.15,0.6) 7(-5.15,0.2) 8(-5.15,-0.2) 9(-5.15,-0.6) 10(-5.15,-1) 11(-5.15,-1.4) 12(-5.15,-1.8) 13(-5.15,-2.2) 40(5.15,-2.2) 41(5.15,-1.8) 42(5.15,-1.4) 43(5.15,-1) 44(5.15,-0.6) 45(5.15,-0.2) 46(5.15,0.2) 47(5.15,0.6) 48(5.15,1) 49(5.15,1.4) 50(5.15,1.8) 51(5.15,2.2)
  oval 0.182x0.8 smd mask+0.051: 15(-4.6,-3.15) 38(4.6,-3.15) 53(4.6,3.15) 76(-4.6,3.15)
  oval 0.182x0.85 smd mask+0.051: 16(-4.2,-3.15) 17(-3.8,-3.15) 18(-3.4,-3.15) 19(-3,-3.15) 20(-2.6,-3.15) 21(-2.2,-3.15) 22(-1.8,-3.15) 23(-1.4,-3.15) 24(-1,-3.15) 25(-0.6,-3.15) 26(-0.2,-3.15) 27(0.2,-3.15) 28(0.6,-3.15) 29(1,-3.15) 30(1.4,-3.15) 31(1.8,-3.15) 32(2.2,-3.15) 33(2.6,-3.15) 34(3,-3.15) 35(3.4,-3.15) 36(3.8,-3.15) 37(4.2,-3.15) 54(4.2,3.15) 55(3.8,3.15) 56(3.4,3.15) 57(3,3.15) 58(2.6,3.15) 59(2.2,3.15) 60(1.8,3.15) 61(1.4,3.15) 62(1,3.15) 63(0.6,3.15) 64(0.2,3.15) 65(-0.2,3.15) 66(-0.6,3.15) 67(-1,3.15) 68(-1.4,3.15) 69(-1.8,3.15) 70(-2.2,3.15) 71(-2.6,3.15) 72(-3,3.15) 73(-3.4,3.15) 74(-3.8,3.15) 75(-4.2,3.15)
  rect 9x5 smd: 77(0,0)
  silkscreen extent -6.17,-3.4 5.4,3.4, body extent -5.25,-3.25 5.25,3.25, height 0.9
TL3305 [mm] "TL3305 SPST-NO"
  rect 1.4x1.6 smd: 1(-1.5,3.6) 2(-1.5,-3.6) 3(1.5,3.6) 4(1.5,-3.6)
  silkscreen extent -2.8,-2.25 2.25,3.7
TP380X203 [mm]
  rect 3.8x2.03 smd: 1(0,0)

## Part data
C1: library part "CAP 3300pF 16V", "CAP CER 3300PF 16V X5R 0603/0805", Operating Temperature="-55°C ~ 85°C", Package=0603/0805, Rating=16V, Temperature Coefficient=X5R, Tolerance=10%
C2 C5 C6 C16 C17_A C17_B C17_C C17_D C17_E C21_A C21_B C21_C C21_D C21_E C23_A C23_B C23_C C23_D C23_E C24_A C24_B C24_C C24_D C24_E C25_A C25_B C25_C C25_D C25_E C26_A C26_B C26_C C26_D C26_E C27_A C27_B C27_C C27_D C27_E C28_A C28_B C28_C C28_D C28_E C29_A C29_B C29_C C29_D C29_E C32_A C32_B C32_C C32_D C32_E C33_A C33_B C33_C C33_D C33_E C34_A C34_B C34_C C34_D C34_E C35_A C35_B C35_C C35_D C35_E C36_A C36_B C36_C C36_D C36_E C37_A C37_B C37_C C37_D C37_E: library part "CAP 100nF 50V", "CAP CER 0.1UF 50V X7R 0805", Package=0805, Rating=50V, Tolerance=10%
C3 C4 C7 C8 C9 C10 C11 C12 C13 C14 C15: library part "CAP 100pF 50V", "CAP CER 100PF 50V X7R 0603/0805", Operating Temperature="-55°C ~ 125°C", Package=0603/0805, Rating=50V, Temperature Coefficient=X7R, Tolerance=10%
C18_A C18_B C18_C C18_D C18_E C19_A C19_B C19_C C19_D C19_E C20_A C20_B C20_C C20_D C20_E: library part "CAP 1000pF 50V", "CAP CER 1000PF 50V X7R 0603/0805", Operating Temperature="-55°C ~ 125°C", Package=0603/0805, Rating=50V, Temperature Coefficient=X7R, Tolerance=10%
C22_A C22_B C22_C C22_D C22_E C30_A C30_B C30_C C30_D C30_E: library part "CAP 4.7uF 16V", "CAP CER 4.7UF 16V X5R 0603/0805", Operating Temperature="-55°C ~ 85°C", Package=0603/0805, Rating=16V, Temperature Coefficient=X5R, Tolerance=10%
C31_A C31_B C31_C C31_D C31_E: library part "CAP 470nF 50V", "CAP CER 0.1UF 50V X7R 0805", Package=0805, Rating=50V, Tolerance=10%
FB1: library part "FERRITE BEAD 200 MOHM 0603 1LN", "WURTH ELEKTRONIK - 742792651 - Ferrite Bead, 0603 [1608 Metric], 600 ohm, 1 A, WE-CBF Series, 0.2 ohm, &#177; 25%", Case Code (Imperial)=0603, Case Code (Metric)=1608, Case/Package=SMD/SMT, Current Rating=1A, DC Resistance (DCR)=200mR, Inductance=0.36H, Manufacturer="Wurth Electronics", Manufacturer Part Number=742792651, Max Operating Temperature=125°C, Min Operating Temperature=-55°C, Package Quantity=1, Supplier Part Number 1=732-1593-1-ND, Test Frequency=100MHz, Tolerance=25%, Category="Ferrite Beads and Chips", ComponentLink1Description=https://datasheet.ciiva.com/1013/742792651-1013527.pdf?src-supplier=Digi-Key, ComponentLink1URL=https://datasheet.ciiva.com/1013/742792651-1013527.pdf?src-supplier=Digi-Key, ComponentLink2Description=https://datasheet.ciiva.com/1475/1705833-1475349.pdf?src-supplier=Farnell, ComponentLink2URL=https://datasheet.ciiva.com/1475/1705833-1475349.pdf?src-supplier=Farnell, ComponentLink3Description=https://datasheet.ciiva.com/4940/742792651-72243-4940492.pdf?src-supplier=Mouser, ComponentLink3URL=https://datasheet.ciiva.com/4940/742792651-72243-4940492.pdf?src-supplier=Mouser, ComponentLink4Description=https://datasheet.ciiva.com/11803/0900766b80d2e079-11803680.pdf?src-supplier=RSComponents, ComponentLink4URL=https://datasheet.ciiva.com/11803/0900766b80d2e079-11803680.pdf?src-supplier=RSComponents, ComponentLink5Description=https://datasheet.ciiva.com/1013/742792651-1013528.pdf?src-supplier=Digi-Key, ComponentLink5URL=https://datasheet.ciiva.com/1013/742792651-1013528.pdf?src-supplier=Digi-Key, ComponentLink6Description=https://datasheet.ciiva.com/1013/742792651-1013529.pdf?src-supplier=Digi-Key, ComponentLink6URL=https://datasheet.ciiva.com/1013/742792651-1013529.pdf?src-supplier=Digi-Key, ComponentLink7Description=https://datasheet.ciiva.com/22711/1705833-22711420.pdf?src-supplier=Element14, ComponentLink7URL=https://datasheet.ciiva.com/22711/1705833-22711420.pdf?src-supplier=Element14, Core Material=Ferrite, Depth=0.8mm, Height=0.8mm, Impedance=600R, Lead Free="Lead Free", Length=1.6mm, Material=Ferrite, Max Current Rating=1A, Max DC Current=1A, Mount="Surface Mount", Number of Lines=1, Packaging="Tape and Reel", Pricing 1="1=0.17000, 50=0.16800, 100=0.15500, 500=0.14800, 1000=0.14100, 2000=0.13400 (USD)", REACH SVHC=Unknown, Resistance=200mR, RoHS=Yes, RoHS Compliant=Yes, Series=WE-CBF, Stock 1=492945, Supplier 1=Digi-Key, Termination=SMD/SMT, Weight=0.000141oz, Width=0.8mm
J1_A J1_B J1_C J1_D J1_E: "Molex 26013115 4POS Minifit / dual row, right angle"
J2_A J2_B J2_C J2_D J2_E: "Molex 43045-0622 6POS Microfit / dual row, right angle"
L1 L2 L3: library part "IND 56UH 4A 65 mOHM SMD", "FIXED IND 56UH 4A 65 MOHM SMD Shielded - Inductor 65mOhm Max Nonstandard -", Current Rating=4A, DC Resistance=65mOhm, Digi-Key Part Number=283-HCM1A1307V2-560-RTR-ND, Supplier Part Number 1=283-HCM1A1307V2-560-RCT-ND, Supplier 1=Digi-Key
LED1_A LED1_B LED1_C LED1_D LED1_E: library part "LED BLUE SMD", "LED BLUE CLEAR 0603 SMD", Case Code (Imperial)=0603, Case Code (Metric)=1608, Color=Blue, Forward Current=20mA, Forward Voltage=3.8V, Lens Color=Colorless, Manufacturer="Vishay Lite-On", Manufacturer Part Number=LTST-C191TBKT, Max Operating Temperature=80°C, Max Power Dissipation=75mW, Min Operating Temperature=-20°C, Package Quantity=1, Power Dissipation=76mW, Reverse Voltage=5V, Supplier Part Number 1=160-1647-1-ND, Case/Package=0603, Category=LEDs, ComponentLink1Description=https://datasheet.ciiva.com/2110/ltst-c191tbkt-2110256.pdf?src-supplier=Digi-Key, ComponentLink1URL=https://datasheet.ciiva.com/2110/ltst-c191tbkt-2110256.pdf?src-supplier=Digi-Key, ComponentLink2Description=https://datasheet.ciiva.com/12400/lite-on-ltst-c191tbkt-187207-12400737.pdf?src-supplier=Mouser, ComponentLink2URL=https://datasheet.ciiva.com/12400/lite-on-ltst-c191tbkt-187207-12400737.pdf?src-supplier=Mouser, ComponentLink3Description=https://datasheet.ciiva.com/16444/ltst-c191tbkt-16444756.pdf?src-supplier=Future+Electronics, ComponentLink3URL=https://datasheet.ciiva.com/16444/ltst-c191tbkt-16444756.pdf?src-supplier=Future+Electronics, ComponentLink4Description=https://datasheet.ciiva.com/11774/0900766b80dc02b4-11774413.pdf?src-supplier=RSComponents, ComponentLink4URL=https://datasheet.ciiva.com/11774/0900766b80dc02b4-11774413.pdf?src-supplier=RSComponents, ComponentLink5Description=https://datasheet.ciiva.com/15117/getdatasheetpartid-133342-15117680.pdf?src-supplier=Verical, ComponentLink5URL=https://datasheet.ciiva.com/15117/getdatasheetpartid-133342-15117680.pdf?src-supplier=Verical, ComponentLink6Description=https://datasheet.ciiva.com/19465/2047945-19465673.pdf?src-supplier=Jameco, ComponentLink6URL=https://datasheet.ciiva.com/19465/2047945-19465673.pdf?src-supplier=Jameco, ComponentLink7Description=https://datasheet.ciiva.com/26913/ltst-c191tbkt-26913718.pdf?src-supplier=IIIC, ComponentLink7URL=https://datasheet.ciiva.com/26913/ltst-c191tbkt-26913718.pdf?src-supplier=IIIC, ComponentLink8Description=https://datasheet.ciiva.com/2110/s-110-ltst-c191tbkt-2110257.pdf?src-supplier=Digi-Key, ComponentLink8URL=https://datasheet.ciiva.com/2110/s-110-ltst-c191tbkt-2110257.pdf?src-supplier=Digi-Key, Depth=1.6mm, Dominant Wavelength=475nm, Height=0.55mm, Illumination Color=Blue, Lead Free="Lead Free", Length=0.8mm, Lens Style=Diffused,Colorless,Clear,Rectangular, Lens Transparency=Clear, Luminous Intensity=180mcd, Mount="Surface Mount", Number of Elements=1, Number of LEDs=1, Number of Pins=2, Packaging="Tape and Reel", Pricing 1="1=0.33000, 10=0.26200, 100=0.11780, 500=0.10640, 1000=0.08740, 2000=0.07600 (USD)", Radiation Hardening=No, RoHS=Yes, RoHS Compliant=Yes, Stock 1=98884, Supplier 1=Digi-Key, Test Current=20mA, Viewing Angle=130°, Wavelength=468nm, Width=0.8mm
P1 P3: "Header, 5-Pin", LatestRevisionDate=17-Jul-2002, LatestRevisionNote="Re-released for DXP Platform.", Publisher="Altium Limited"
P2: "Header, 4-Pin", LatestRevisionDate=17-Jul-2002, LatestRevisionNote="Re-released for DXP Platform.", Publisher="Altium Limited"
R1: library part "RES 39k 1/8W", "RES SMD 39K OHM 5% 1/8W 0603/0805", Package=0805, Power (Watts)=0.125W, Tolerance=5%
R2 R4 R6 R7 R8: library part "RES 150.0 1/8W - 1%", "RES SMD 150 OHM 1% 1/8W 0603/0805", Package=0805, Power (Watts)=0.125W, Tolerance=1%
R3: library part "RES 100.0 1/8W", "RES SMD 100 OHM 5% 1/8W 0603/0805", Package=0805, Power (Watts)=0.125W, Tolerance=5%
R5 R10 R16 R18 R26_A R26_B R26_C R26_D R26_E R27_A R27_B R27_C R27_D R27_E R28_A R28_B R28_C R28_D R28_E R29_A R29_B R29_C R29_D R29_E R30_A R30_B R30_C R30_D R30_E R31_A R31_B R31_C R31_D R31_E R32_A R32_B R32_C R32_D R32_E R33_A R33_B R33_C R33_D R33_E R34_A R34_B R34_C R34_D R34_E: library part "RES 4.7k 1/8W - 1%", "RES SMD 4.7k OHM 1% 1/8W 0805", Package=0805, Power (Watts)=0.125W, Tolerance=1%
R9 R11 R13 R14 R15 R17 R19 R20 R21 R22 R23: library part "RES 270.0 1/8W - 1%", "RES SMD 270 OHM 1% 1/8W 0603/0805", Package=0805, Power (Watts)=0.125W, Tolerance=1%
R12: library part "RES NTC THERM 10k", "RES SMD THERMISTOR NTC 10KOHM 3380K 0603", Case Code (Imperial)=0603, Case Code (Metric)=1608, Current Rating=310uA, Manufacturer=Murata, Manufacturer Series=NCP18, Max Operating Temperature=125°C, Max Power Dissipation=100mW, Min Operating Temperature=-40°C, MPN=NCP18XH103F03RB, Package Quantity=1, Package Shape=Rectangular, Resistance=10k, Resistance Tolerance=1%, Supplier Part Number 1=490-4800-1-ND, Accuracy=0.7%, Case/Package=0603, Category=Thermistors, ComponentLink1Description=https://datasheet.ciiva.com/4504/r44e-3685-4504704.pdf?src-supplier=Mouser, ComponentLink1URL=https://datasheet.ciiva.com/4504/r44e-3685-4504704.pdf?src-supplier=Mouser, ComponentLink2Description=https://datasheet.ciiva.com/11822/0900766b807f1e39-11822112.pdf?src-supplier=RSComponents, ComponentLink2URL=https://datasheet.ciiva.com/11822/0900766b807f1e39-11822112.pdf?src-supplier=RSComponents, ComponentLink3Description=https://datasheet.ciiva.com/3280/l0770e-3280357.pdf?src-supplier=Avnet, ComponentLink3URL=https://datasheet.ciiva.com/3280/l0770e-3280357.pdf?src-supplier=Avnet, ComponentLink4Description=https://datasheet.ciiva.com/3280/l0770e-3280679.pdf?src-supplier=Avnet, ComponentLink4URL=https://datasheet.ciiva.com/3280/l0770e-3280679.pdf?src-supplier=Avnet, ComponentLink5Description=https://datasheet.ciiva.com/2848/r44e-2848445.pdf?src-supplier=Digi-Key, ComponentLink5URL=https://datasheet.ciiva.com/2848/r44e-2848445.pdf?src-supplier=Digi-Key, ComponentLink6Description=https://datasheet.ciiva.com/2848/r44e-2848446.pdf?src-supplier=Digi-Key, ComponentLink6URL=https://datasheet.ciiva.com/2848/r44e-2848446.pdf?src-supplier=Digi-Key, ComponentLink7Description=https://datasheet.ciiva.com/2848/r44e-2848447.pdf?src-supplier=Digi-Key, ComponentLink7URL=https://datasheet.ciiva.com/2848/r44e-2848447.pdf?src-supplier=Digi-Key, ComponentLink8Description=https://datasheet.ciiva.com/16635/l0770e-16635071.pdf?src-supplier=Avnet+Europe, ComponentLink8URL=https://datasheet.ciiva.com/16635/l0770e-16635071.pdf?src-supplier=Avnet+Europe, ComponentLink9Description=https://datasheet.ciiva.com/17993/getdatasheetpartid-153236-17993210.pdf?src-supplier=Verical, ComponentLink9URL=https://datasheet.ciiva.com/17993/getdatasheetpartid-153236-17993210.pdf?src-supplier=Verical, ComponentLink10Description=https://datasheet.ciiva.com/16469/l0770e-16469741.pdf?src-supplier=Future+Electronics, ComponentLink10URL=https://datasheet.ciiva.com/16469/l0770e-16469741.pdf?src-supplier=Future+Electronics, Depth=0.8mm, Height=0.8mm, Lead Free="Lead Free", Length=1.6mm, Mount="Surface Mount", Number of Pins=2, Number of Terminals/Pins=2, Packaging="Tape and Reel", Power Rating=100mW, Pricing 1="1=0.26000, 5=0.23400, 10=0.20800, 25=0.18600, 50=0.16340, 100=0.13930, 500=0.11518, 1000=0.09643 (USD)", Radiation Hardening=No, REACH SVHC="No SVHC", RoHS=Yes, RoHS Compliant=Yes, Series=NCP, Stock 1=172605, Supplier 1=Digi-Key, Terminal Finish=Tin, Terminal Placement=Dual, Termination=SMD/SMT, Thermistor Application="TEMPERATURE COMPENSATION", Tolerance=1%
R24: library part "RES 47k 1/8W - 1%", "RES SMD 47K OHM 1% 1/8W 0805", Package=0805, Power (Watts)=0.125W, Tolerance=1%
R25 R35_A R35_B R35_C R35_D R35_E R36_A R36_B R36_C R36_D R36_E R37_A R37_B R37_C R37_D R37_E: library part "RES 1k 1/8W - 1%", "RES SMD 1K OHM 1% 1/8W 0603/0805", Package=0805, Power (Watts)=0.125W, Tolerance=1%
SW1: "Tactile Switch SPST-NO Top Actuated Surface Mount 12V 50mA", Actuator Height=5mm, Circuit=SPST-NO, ComponentLink1Description=Digikey, ComponentLink1URL=https://www.digikey.ca/en/products/detail/e-switch/TL3305BF260QG/5816185, ComponentLink2Description=Datasheet, ComponentLink2URL=https://sten-eswitch-13110800-production.s3.amazonaws.com/system/asset/product_line/data_sheet/213/TL3305.pdf, Digikey=EG5354DKR-ND, MF=E-Switch, Mounting Type=SMD, MP=TL3305BF260QG, Switch Function=Off-Mom
TP1_A TP1_B TP1_C TP1_D TP1_E TP2_A TP2_B TP2_C TP2_D TP2_E TP3_A TP3_B TP3_C TP3_D TP3_E: "PC Test Point, Miniature Phosphor Bronze, Silver Plating Surface Mount Mounting Type", Package="2010 Keystone", Digi-Key_Part_Number=36-5019CT-ND, Digi-Key_Purchase_URL=https://www.digikey.com/product-detail/en/keystone-electronics/5019/36-5019CT-ND/3907344?utm_source=snapeda&utm_medium=aggregator&utm_campaign=symbol, MF="Keystone Electronics", MP=5019
U1_A U1_B U1_C U1_D U1_E: "Multiphase Motor Driver Power MOSFET SPI, Step/Direction 76-QFN", MF=TRINAMIC, MPN=TMC4671
U2_A U2_B U2_C U2_D U2_E U3_A U3_B U3_C U3_D U3_E: "IC BUFFER TRIPLE SCHMITT TRIGGER 5.5V VSSOP-8", Manufacturer=Nexperia, Supplier Part Number 1=33AC1281, Category="Logic Gates", Manufacturer Part Number=74LVC3G17DC,125, Pricing 1="1=0.84800, 5=0.83500, 10=0.70800, 25=0.62000, 50=0.53200, 100=0.44500, 250=0.41300, 500=0.38300, 1000=0.35200 (USD)", RoHS=Yes, RoHS Compliant=Yes, Stock 1=2995, Supplier 1=Newark
X1: library part "XTAL OSC 25MHz 3.3V", "XTAL OSC XO 25.0MHZ CMOS SMD", Manufacturer="ECS International", Supplier Part Number 1=XC2830CT-ND, Category=Oscillators, ComponentLink1Description=https://www.ecsxtal.com/store/pdf/ECS-1612MV.pdf?src-supplier=Digi-Key, ComponentLink1URL=https://www.ecsxtal.com/store/pdf/ECS-1612MV.pdf?src-supplier=Digi-Key, MPN=ECS-1612MV-250-CN-TR, Pricing 1="1=1.90000, 10=1.81900, 50=1.77640, 100=1.52260, 500=1.48032, 1000=1.24770 (USD)", RoHS=Yes, RoHS Compliant=Yes, Stock 1=5323, Supplier 1=Digi-Key

## Via types
v1: diameter 24, hole 10, Top Copper to Bottom Copper, 160 vias

## Nets (pads, with @x,y where several pads share a name; then routed paths per layer and width w, separated by ;. In a path a pad name is that pad's centre, name@x,y a point inside that pad or via, vN(x,y) a via of type N, cw(c..) or ccw(c..) an arc to the next point about the centre after c; other vN are vias at no path point)
2.5V_REF: C2.2 R5.2 R10.1 U1_A.17 U1_A.19 U1_B.17 U1_B.19 U1_C.17 U1_C.19 U1_D.17 U1_D.19 U1_E.17 U1_E.19
5V: C22_A.2 C22_B.2 C22_C.2 C22_D.2 C22_E.2 C23_A.2 C23_B.2 C23_C.2 C23_D.2 C23_E.2 R5.1 R26_A.1 R26_B.1 R26_C.1 R26_D.1 R26_E.1 R27_A.1 R27_B.1 R27_C.1 R27_D.1 R27_E.1 R28_A.1 R28_B.1 R28_C.1 R28_D.1 R28_E.1 R32_A.1 R32_B.1 R32_C.1 R32_D.1 R32_E.1 R33_A.1 R33_B.1 R33_C.1 R33_D.1 R33_E.1 R34_A.1 R34_B.1 R34_C.1 R34_D.1 R34_E.1 U1_A.23 U1_B.23 U1_C.23 U1_D.23 U1_E.23
ADC_VM: C16.2 R24.2 R25.1 U1_A.20 U1_B.20 U1_C.20 U1_D.20 U1_E.20
BRAKE1: U1_A.31
BRAKE2: U1_B.31
BRAKE3: U1_C.31
BRAKE4: U1_D.31
BRAKE_E: U1_E.31
CLK: U1_A.51 U1_B.51 U1_C.51 U1_D.51 U1_E.51 X1.3
CTRL_EN: C3.2 U1_A.55 U1_B.55 U1_C.55 U1_D.55 U1_E.55
CUR_U_A: U1_A.16
CUR_U_B: U1_B.16
CUR_U_C: U1_C.16
CUR_U_D: U1_D.16
CUR_U_E: U1_E.16
CUR_W_A: U1_A.18
CUR_W_B: U1_B.18
CUR_W_C: U1_C.18
CUR_W_D: U1_D.18
CUR_W_E: U1_E.18
DRV_EN1: U1_A.32
DRV_EN2: U1_B.32
DRV_EN3: U1_C.32
DRV_EN4: U1_D.32
DRV_EN_E: U1_E.32
ENC5.ENC_A: R32_E.2 R35_E.1
ENC5.ENC_B: R33_E.2 R36_E.1
ENC5.ENC_N: R34_E.2 R37_E.1
ENC.ENC_A_A: R32_A.2 R35_A.1
ENC.ENC_A_B: R32_B.2 R35_B.1
ENC.ENC_A_C: R32_C.2 R35_C.1
ENC.ENC_A_D: R32_D.2 R35_D.1
ENC.ENC_A_N: R34_A.2 R37_A.1
ENC.ENC_B_A: R33_A.2 R36_A.1
ENC.ENC_B_B: R33_B.2 R36_B.1
ENC.ENC_B_C: R33_C.2 R36_C.1
ENC.ENC_B_D: R33_D.2 R36_D.1
ENC.ENC_B_N: R34_B.2 R37_B.1
ENC.ENC_C_N: R34_C.2 R37_C.1
ENC.ENC_D_N: R34_D.2 R37_D.1
GND: C1.1 C3.1 C4.1 C5.1 C6.1 C7.1 C8.1 C9.1 C10.1 C11.1 C12.1 C13.1 C14.1 C15.1 C18_A.1 C18_B.1 C18_C.1 C18_D.1 C18_E.1 C19_A.1 C19_B.1 C19_C.1 C19_D.1 C19_E.1 C20_A.1 C20_B.1 C20_C.1 C20_D.1 C20_E.1 C22_A.1 C22_B.1 C22_C.1 C22_D.1 C22_E.1 C23_A.1 C23_B.1 C23_C.1 C23_D.1 C23_E.1 C24_A.1 C24_B.1 C24_C.1 C24_D.1 C24_E.1 C25_A.1 C25_B.1 C25_C.1 C25_D.1 C25_E.1 C26_A.1 C26_B.1 C26_C.1 C26_D.1 C26_E.1 C27_A.1 C27_B.1 C27_C.1 C27_D.1 C27_E.1 C28_A.1 C28_B.1 C28_C.1 C28_D.1 C28_E.1 C29_A.1 C29_B.1 C29_C.1 C29_D.1 C29_E.1 C31_A.1 C31_B.1 C31_C.1 C31_D.1 C31_E.1 C32_A.1 C32_B.1 C32_C.1 C32_D.1 C32_E.1 C33_A.1 C33_B.1 C33_C.1 C33_D.1 C33_E.1 C34_A.1 C34_B.1 C34_C.1 C34_D.1 C34_E.1 C36_A.1 C36_B.1 C36_C.1 C36_D.1 C36_E.1 C37_A.1 C37_B.1 C37_C.1 C37_D.1 C37_E.1 J2_A.4 J2_B.4 J2_C.4 J2_D.4 J2_E.4 LED1_A.2 LED1_B.2 LED1_C.2 LED1_D.2 LED1_E.2 R10.2 R18.2 R25.2 SW1.1 SW1.2 U1_A.3 U1_A.14 U1_A.24 U1_A.44 U1_A.53 U1_A.54 U1_A.59 U1_A.60 U1_A.62 U1_A.73 U1_A.77 U1_B.3 U1_B.14 U1_B.24 U1_B.44 U1_B.53 U1_B.54 U1_B.59 U1_B.60 U1_B.62 U1_B.73 U1_B.77 U1_C.3 U1_C.14 U1_C.24 U1_C.44 U1_C.53 U1_C.54 U1_C.59 U1_C.60 U1_C.62 U1_C.73 U1_C.77 U1_D.3 U1_D.14 U1_D.24 U1_D.44 U1_D.53 U1_D.54 U1_D.59 U1_D.60 U1_D.62 U1_D.73 U1_D.77 U1_E.3 U1_E.14 U1_E.24 U1_E.44 U1_E.53 U1_E.54 U1_E.59 U1_E.60 U1_E.62 U1_E.73 U1_E.77 U2_A.4 U2_B.4 U2_C.4 U2_D.4 U2_E.4 U3_A.4 U3_B.4 U3_C.4 U3_D.4 U3_E.4 X1.2
  other v1: 19605.04,7698.43 19648.35,7698.43 19691.65,7698.43 19734.96,7698.43 19605.04,7741.73 19648.35,7741.73 19691.65,7741.73 19734.96,7741.73 19605.04,7785.04 19648.35,7785.04 19691.65,7785.04 19734.96,7785.04 19605.04,7828.35 19648.35,7828.35 19691.65,7828.35 19734.96,7828.35 19605.04,7871.65 19648.35,7871.65 19691.65,7871.65 19734.96,7871.65 19605.04,7914.96 19648.35,7914.96 19691.65,7914.96 19734.96,7914.96 19605.04,7958.27 19648.35,7958.27 19691.65,7958.27 19734.96,7958.27 19605.04,8001.57 19648.35,8001.57 19691.65,8001.57 19734.96,8001.57 19605.04,8233.43 19648.35,8233.43 19691.65,8233.43 19734.96,8233.43 19605.04,8276.73 19648.35,8276.73 19691.65,8276.73 19734.96,8276.73 19605.04,8320.04 19648.35,8320.04 19691.65,8320.04 19734.96,8320.04 19605.04,8363.35 19648.35,8363.35 19691.65,8363.35 19734.96,8363.35 19605.04,8406.65 19648.35,8406.65 19691.65,8406.65 19734.96,8406.65 19605.04,8449.96 19648.35,8449.96 19691.65,8449.96 19734.96,8449.96 19605.04,8493.27 19648.35,8493.27 19691.65,8493.27 19734.96,8493.27 19605.04,8536.57 19648.35,8536.57 19691.65,8536.57 19734.96,8536.57 19605.04,8768.43 19648.35,8768.43 19691.65,8768.43 19734.96,8768.43 19605.04,8811.73 19648.35,8811.73 19691.65,8811.73 19734.96,8811.73 19605.04,8855.04 19648.35,8855.04 19691.65,8855.04 19734.96,8855.04 19605.04,8898.35 19648.35,8898.35 19691.65,8898.35 19734.96,8898.35 19605.04,8941.65 19648.35,8941.65 19691.65,8941.65 19734.96,8941.65 19605.04,8984.96 19648.35,8984.96 19691.65,8984.96 19734.96,8984.96 19605.04,9028.27 19648.35,9028.27 19691.65,9028.27 19734.96,9028.27 19605.04,9071.57 19648.35,9071.57 19691.65,9071.57 19734.96,9071.57 19605.04,9303.43 19648.35,9303.43 19691.65,9303.43 19734.96,9303.43 19605.04,9346.73 19648.35,9346.73 19691.65,9346.73 19734.96,9346.73 19605.04,9390.04 19648.35,9390.04 19691.65,9390.04 19734.96,9390.04 19605.04,9433.35 19648.35,9433.35 19691.65,9433.35 19734.96,9433.35 19605.04,9476.65 19648.35,9476.65 19691.65,9476.65 19734.96,9476.65 19605.04,9519.96 19648.35,9519.96 19691.65,9519.96 19734.96,9519.96 19605.04,9563.27 19648.35,9563.27 19691.65,9563.27 19734.96,9563.27 19605.04,9606.57 19648.35,9606.57 19691.65,9606.57 19734.96,9606.57 19605.04,9838.43 19648.35,9838.43 19691.65,9838.43 19734.96,9838.43 19605.04,9881.73 19648.35,9881.73 19691.65,9881.73 19734.96,9881.73 19605.04,9925.04 19648.35,9925.04 19691.65,9925.04 19734.96,9925.04 19605.04,9968.35 19648.35,9968.35 19691.65,9968.35 19734.96,9968.35 19605.04,10011.65 19648.35,10011.65 19691.65,10011.65 19734.96,10011.65 19605.04,10054.96 19648.35,10054.96 19691.65,10054.96 19734.96,10054.96 19605.04,10098.27 19648.35,10098.27 19691.65,10098.27 19734.96,10098.27 19605.04,10141.57 19648.35,10141.57 19691.65,10141.57 19734.96,10141.57
HALL5.HALL_UX: J2_E.1 R26_E.2 R29_E.1
HALL5.HALL_V: J2_E.2 R27_E.2 R30_E.1
HALL5.HALL_WY: J2_E.3 R28_E.2 R31_E.1
HALL.HALL_UX_A: J2_A.1
HALL.HALL_UX_B: J2_B.1
HALL.HALL_UX_C: R26_C.2 R29_C.1
HALL.HALL_UX_D: R26_D.2 R29_D.1
HALL.HALL_V_A: R27_A.2 R30_A.1
HALL.HALL_V_B: J2_B.2
HALL.HALL_V_C: J2_C.2
HALL.HALL_V_D: J2_D.2
HALL.HALL_WY_A: R28_A.2 R31_A.1
HALL.HALL_WY_B: R28_B.2 R31_B.1
HALL.HALL_WY_C: J2_C.3
HALL.HALL_WY_D: J2_D.3
IND1.U: L1.1
IND1.U_A: J1_A.3 TP1_A.1
IND1.U_B: J1_B.3 TP1_B.1
IND1.U_C: J1_C.3 TP1_C.1
IND1.U_D: J1_D.3 TP1_D.1
IND1.V: L2.1
IND1.V_A: J1_A.1 TP3_A.1
IND1.V_B: J1_B.1 TP3_B.1
IND1.V_C: J1_C.1 TP3_C.1
IND1.V_D: J1_D.1 TP3_D.1
IND1.W: L3.1
IND1.W_A: J1_A.2 TP2_A.1
IND1.W_B: J1_B.2 TP2_B.1
IND1.W_C: J1_C.2 TP2_C.1
IND1.W_D: J1_D.2 TP2_D.1
IND2.U: J1_E.3 L1.2 TP1_E.1
IND2.V: J1_E.1 L2.2 TP3_E.1
IND2.W: J1_E.2 L3.2 TP2_E.1
NetC5_2: C5.2 FB1.2 X1.1 X1.4
NetC18_A_2: C18_A.2 R29_A.2 U2_A.1
NetC18_B_2: C18_B.2 R29_B.2 U2_B.1
NetC18_C_2: C18_C.2 R29_C.2 U2_C.1
NetC18_D_2: C18_D.2 R29_D.2 U2_D.1
NetC18_E_2: C18_E.2 R29_E.2 U2_E.1
NetC19_A_2: C19_A.2 R30_A.2 U2_A.3
NetC19_B_2: C19_B.2 R30_B.2 U2_B.3
NetC19_C_2: C19_C.2 R30_C.2 U2_C.3
NetC19_D_2: C19_D.2 R30_D.2 U2_D.3
NetC19_E_2: C19_E.2 R30_E.2 U2_E.3
NetC20_A_2: C20_A.2 R31_A.2 U2_A.6
NetC20_B_2: C20_B.2 R31_B.2 U2_B.6
NetC20_C_2: C20_C.2 R31_C.2 U2_C.6
NetC20_D_2: C20_D.2 R31_D.2 U2_D.6
NetC20_E_2: C20_E.2 R31_E.2 U2_E.6
NetC24_A_2: C24_A.2 U1_A.15
NetC24_B_2: C24_B.2 U1_B.15